# Altium PCB smartmcupcb.PcbDoc
Units mm, origin at the board's own origin, x right, y up, seen from the top; angles counter-clockwise.
Board outline 60.96 x 47.14 mm, 4 copper layers (Top Layer, GND_layer, 3.3V_layer, Bottom Layer), stack 0.603 mm thick; 88 components, 43 nets, 255 pads, 77 vias.
Unrouted connection lines stored in the file: 67.
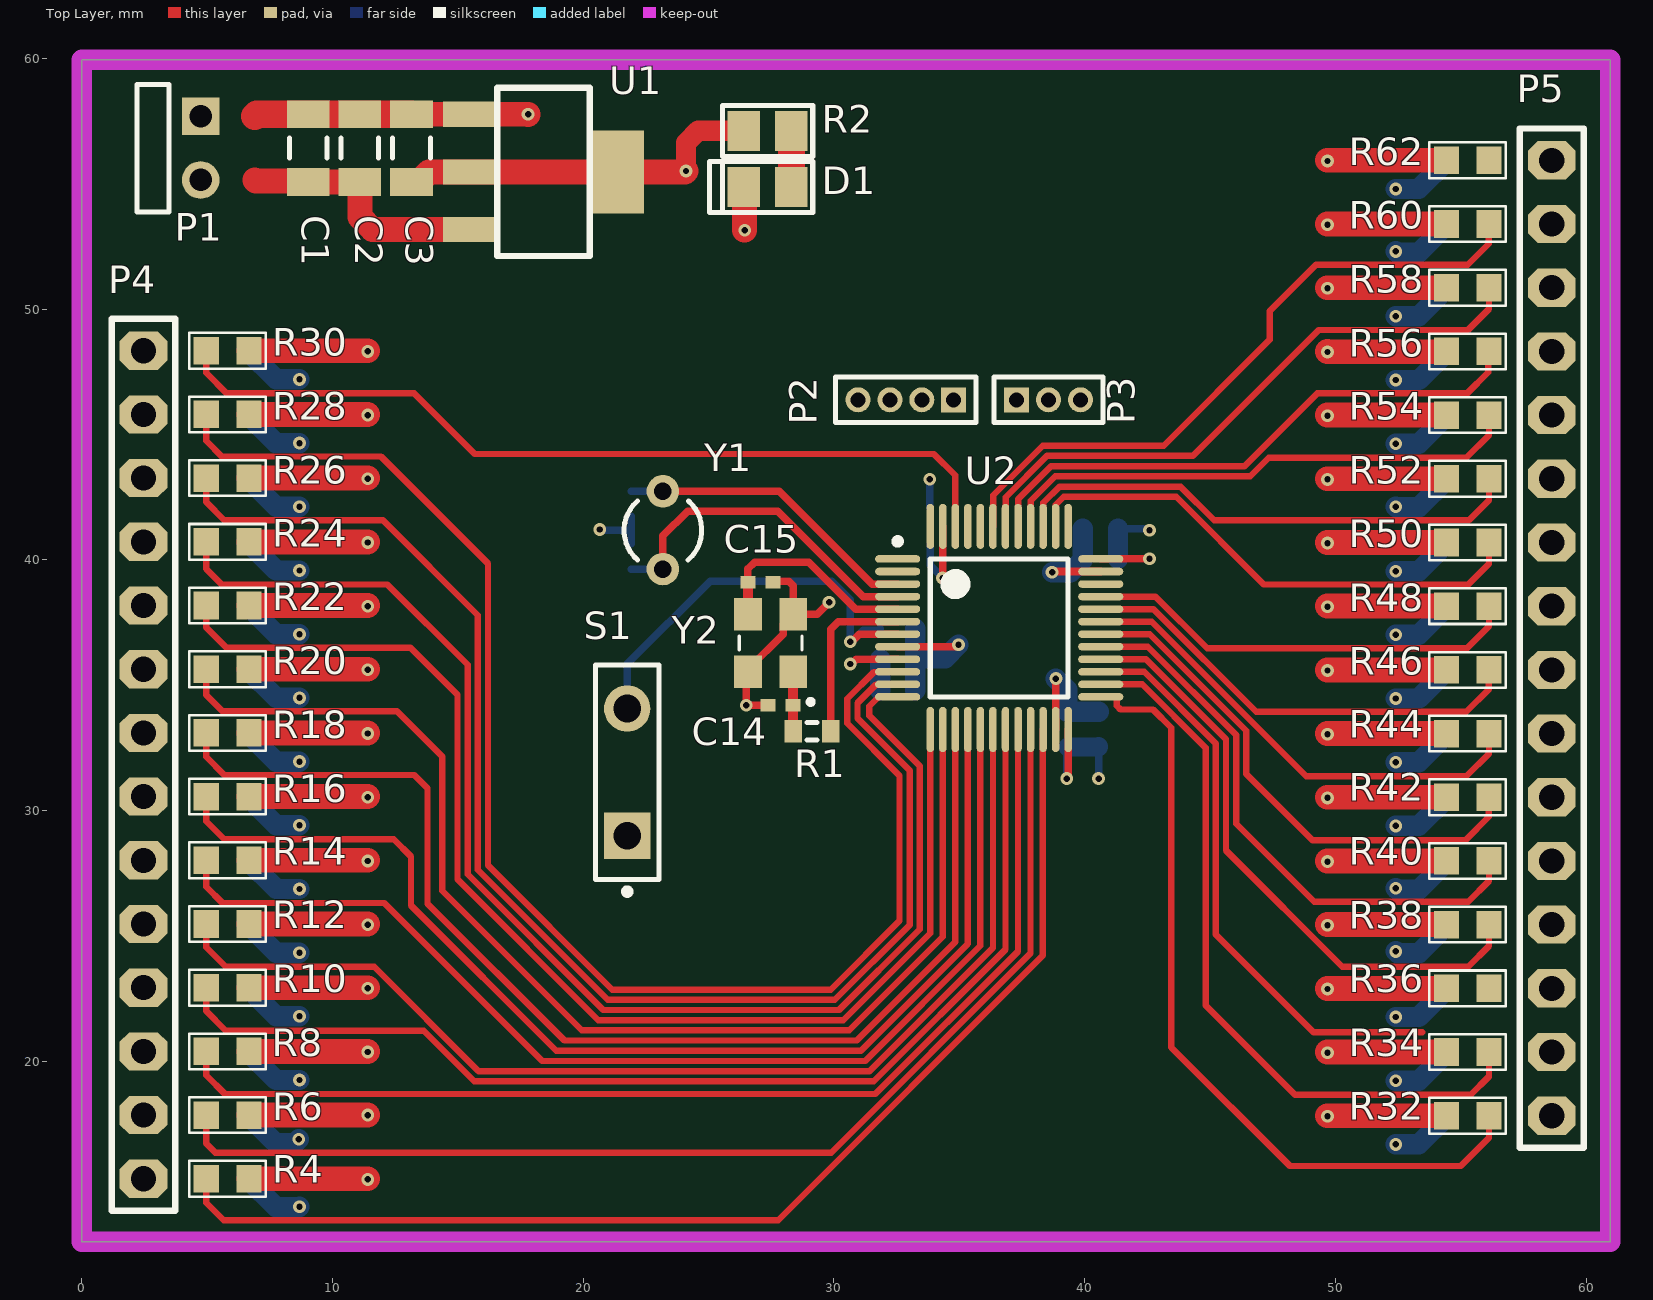
[diagram p0: Top Layer view]
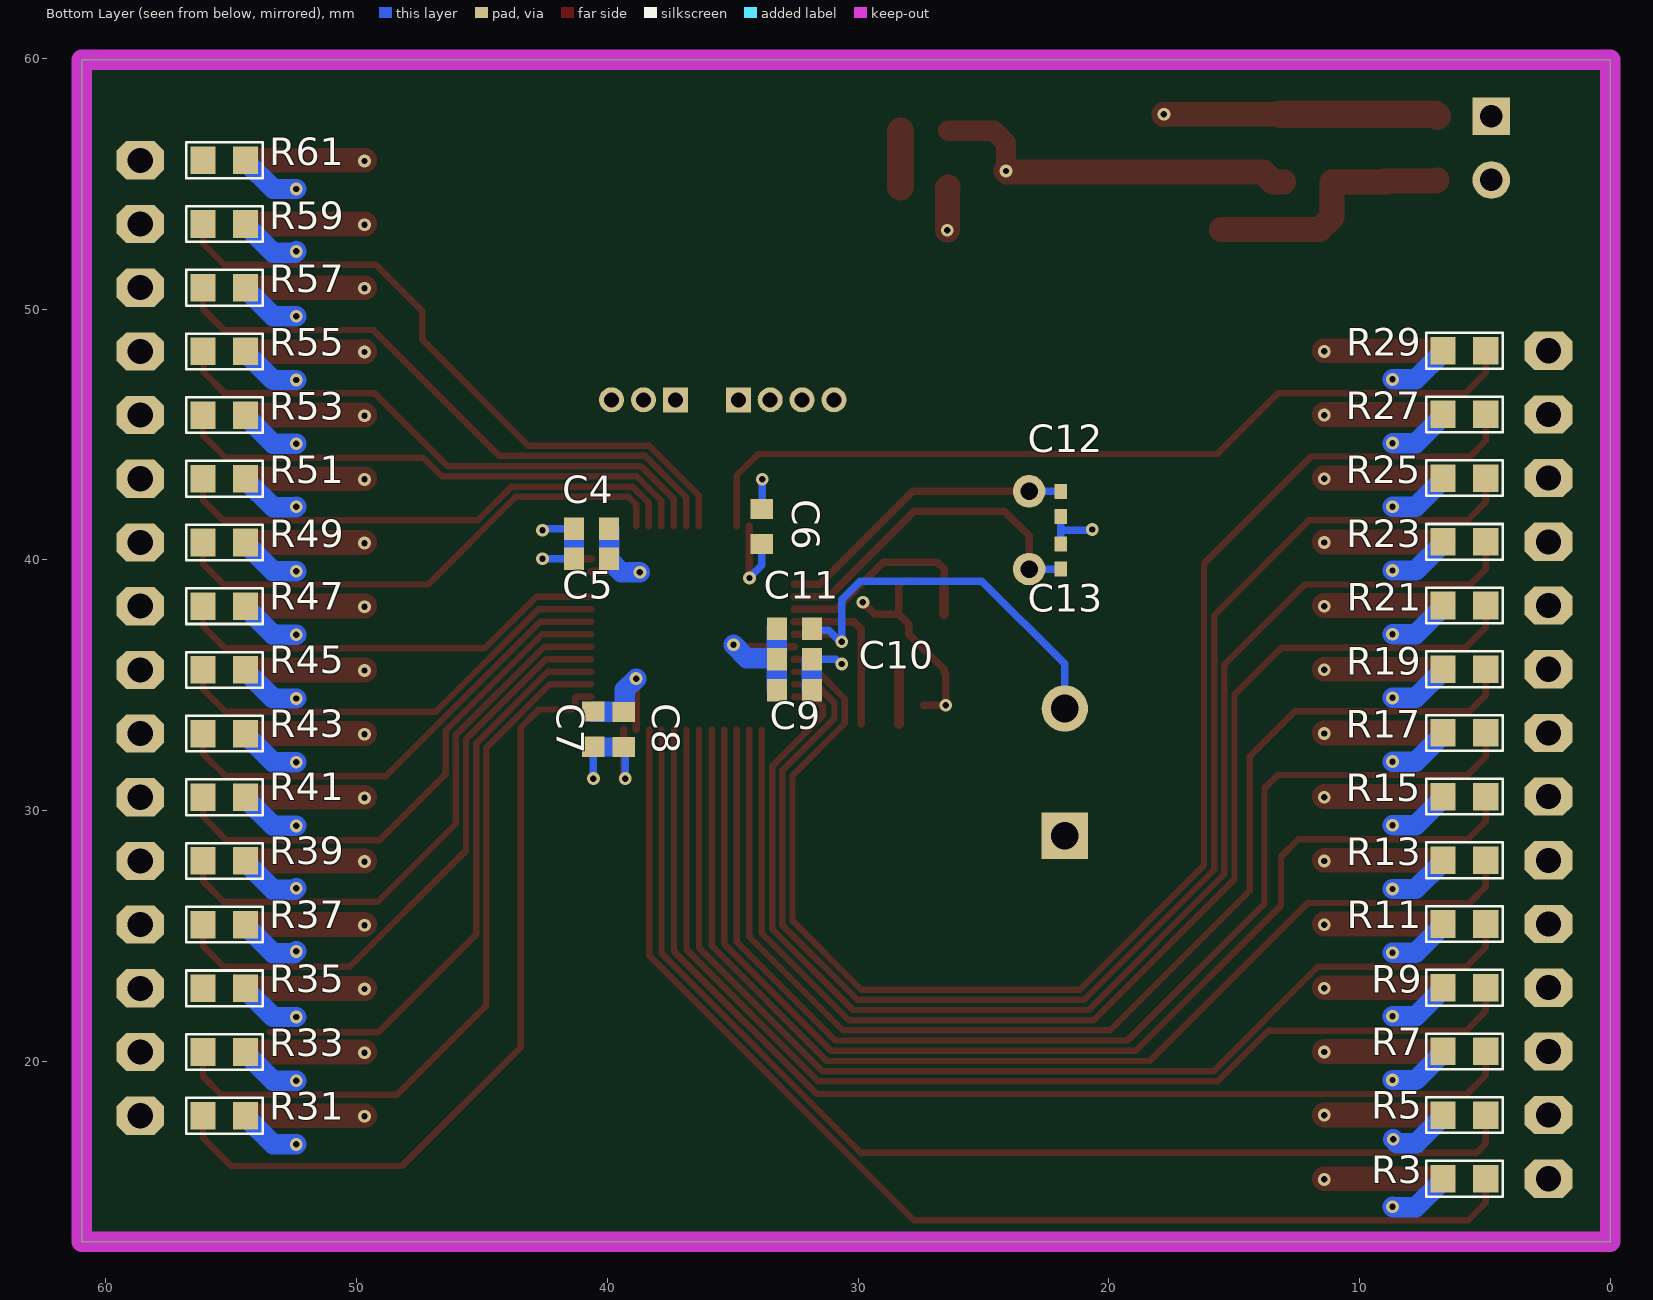
[diagram p1: Bottom Layer view, seen from below]
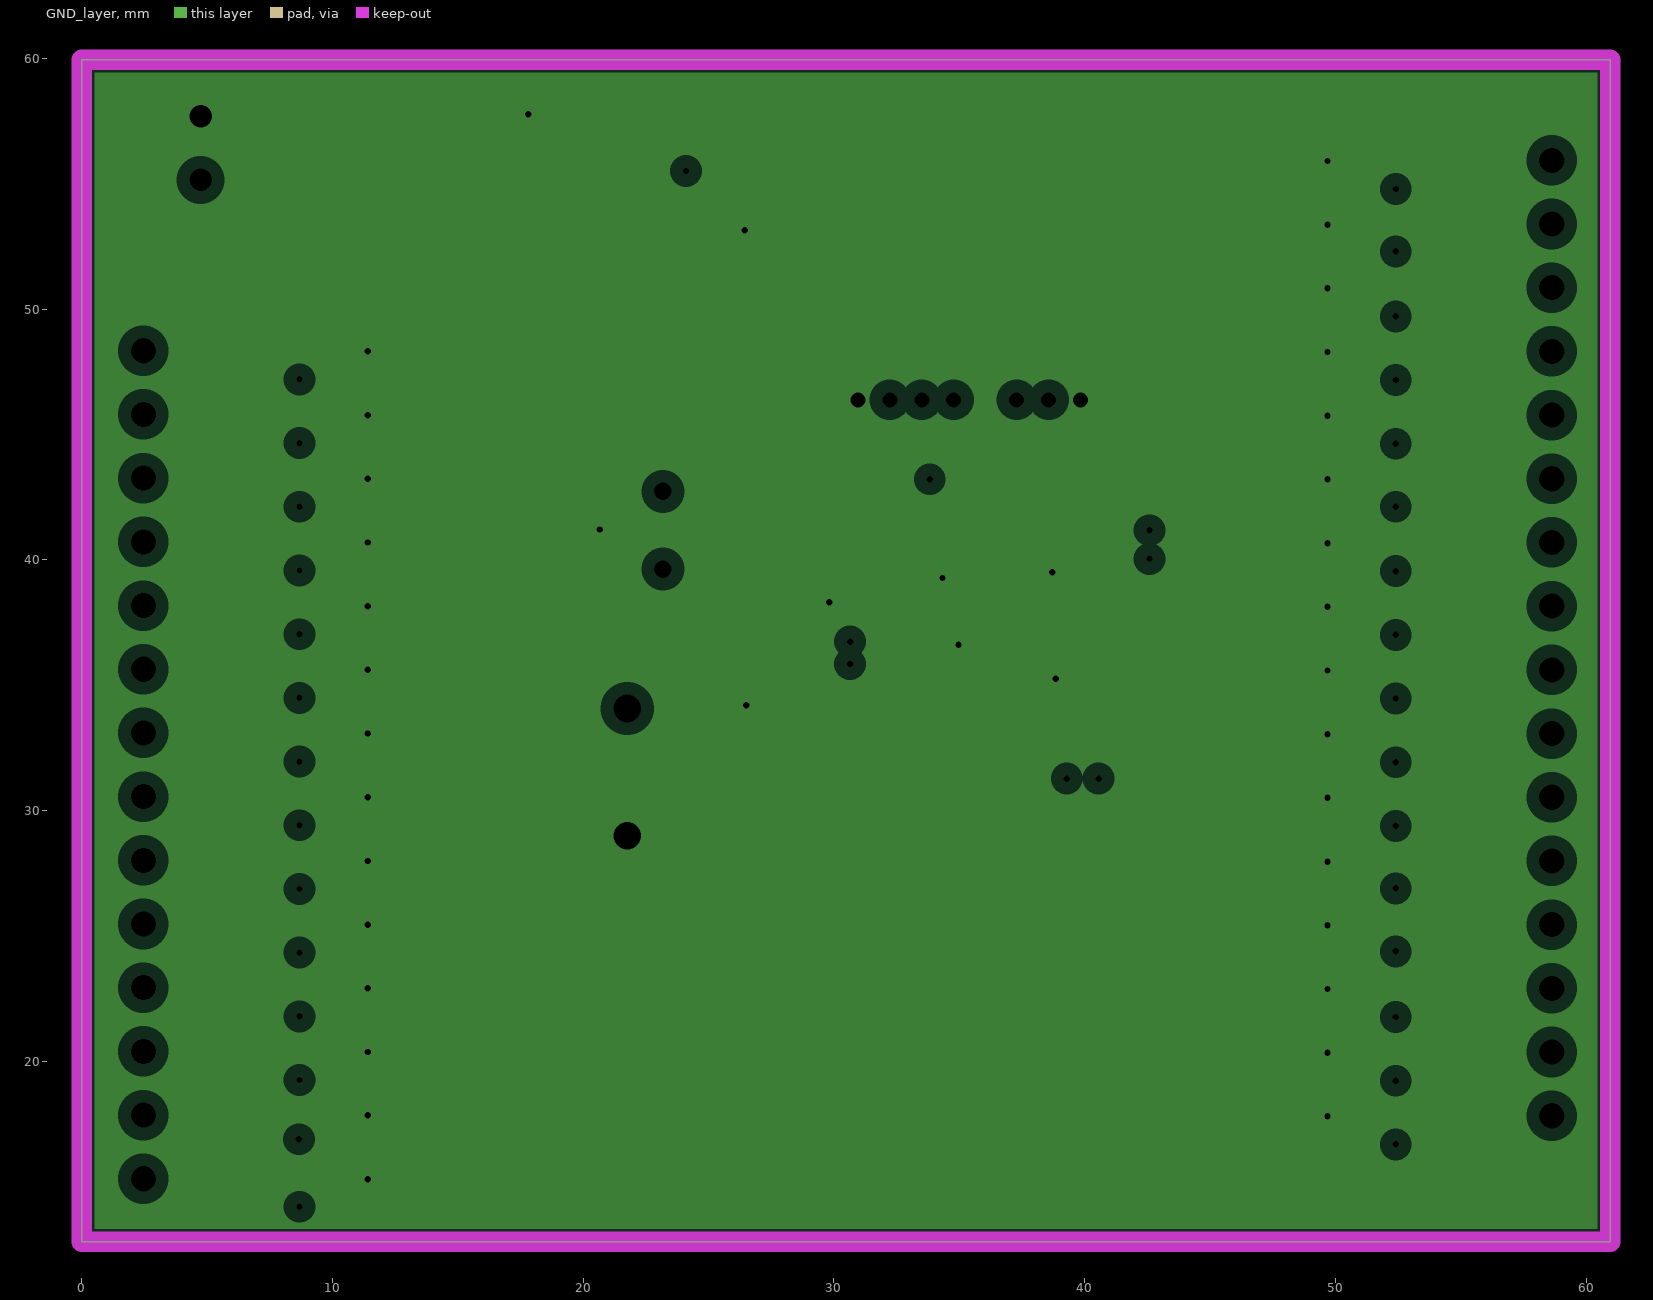
[diagram p2: GND_layer, clearances drawn from the general rule]
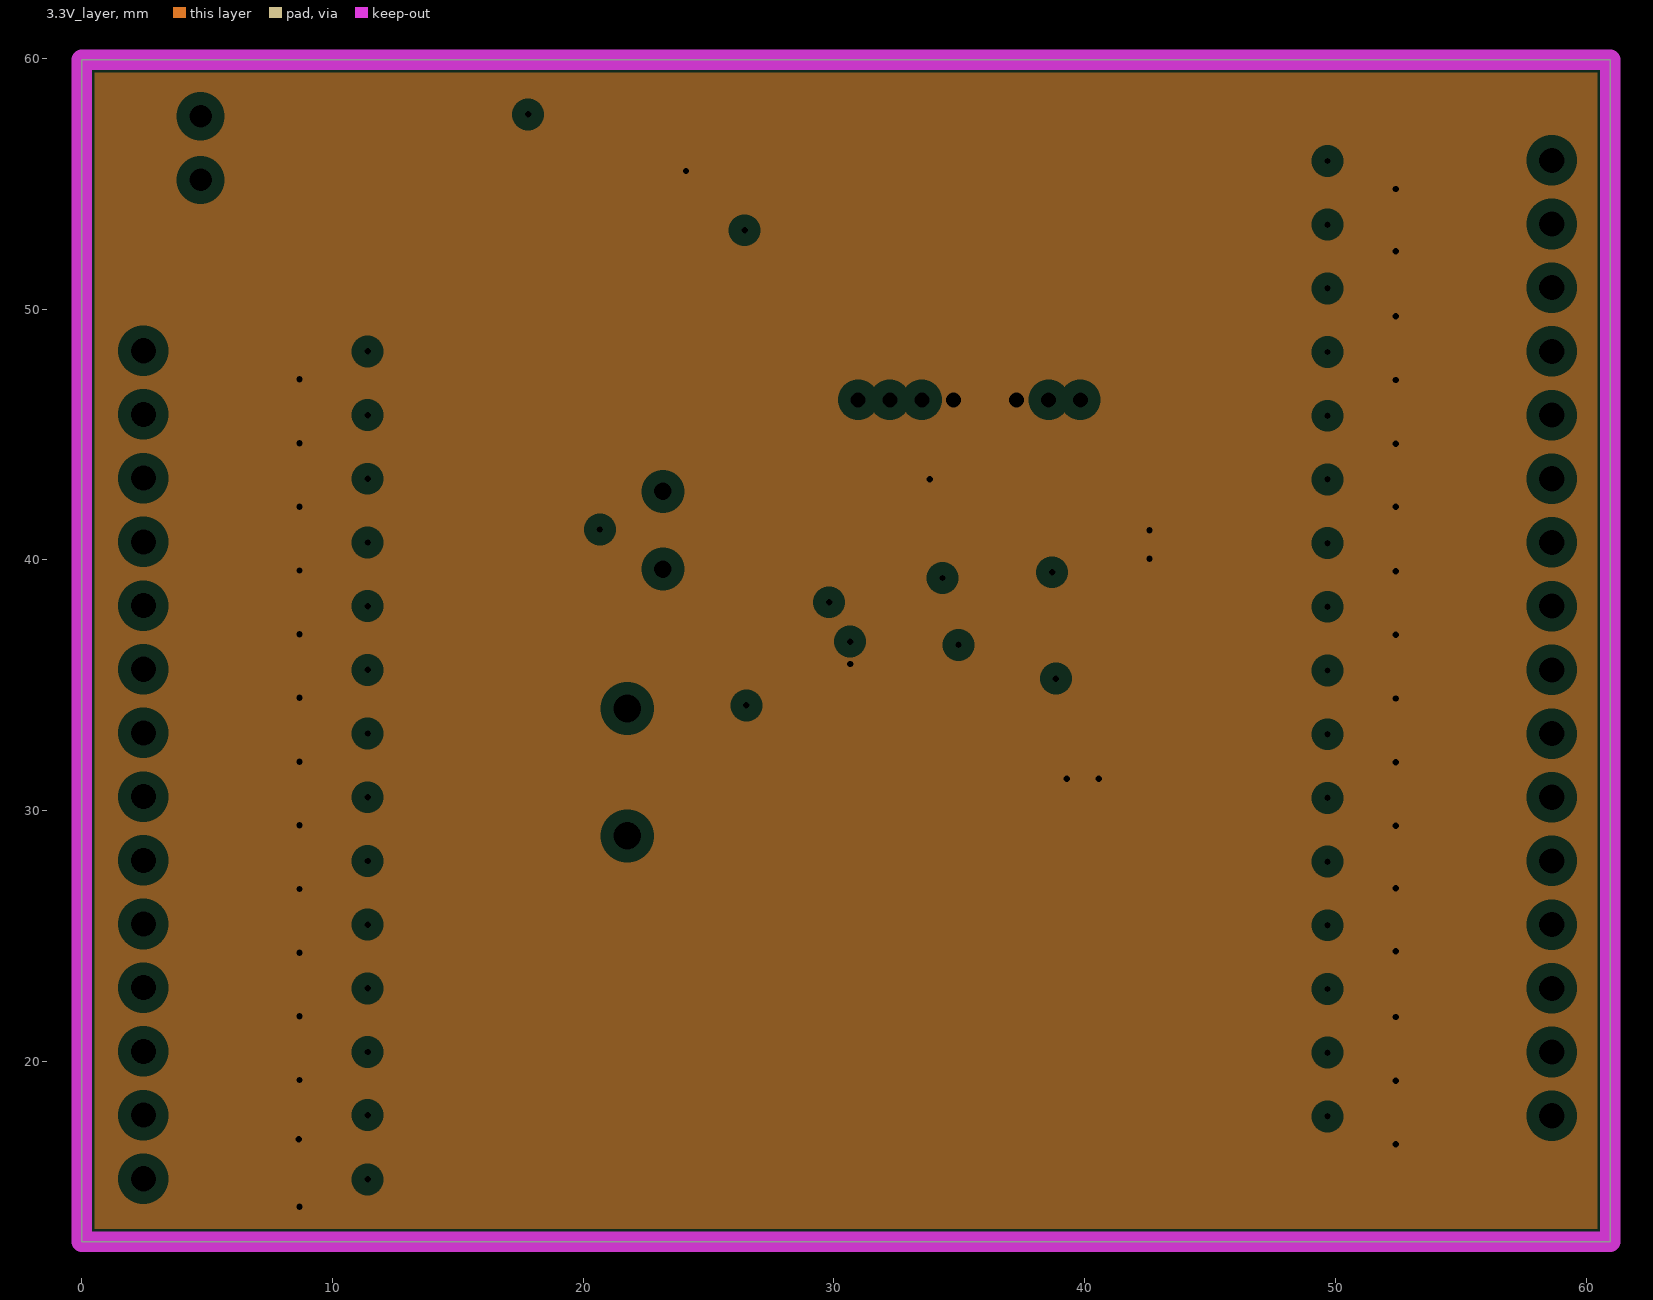
[diagram p3: 3.3V_layer, clearances drawn from the general rule]
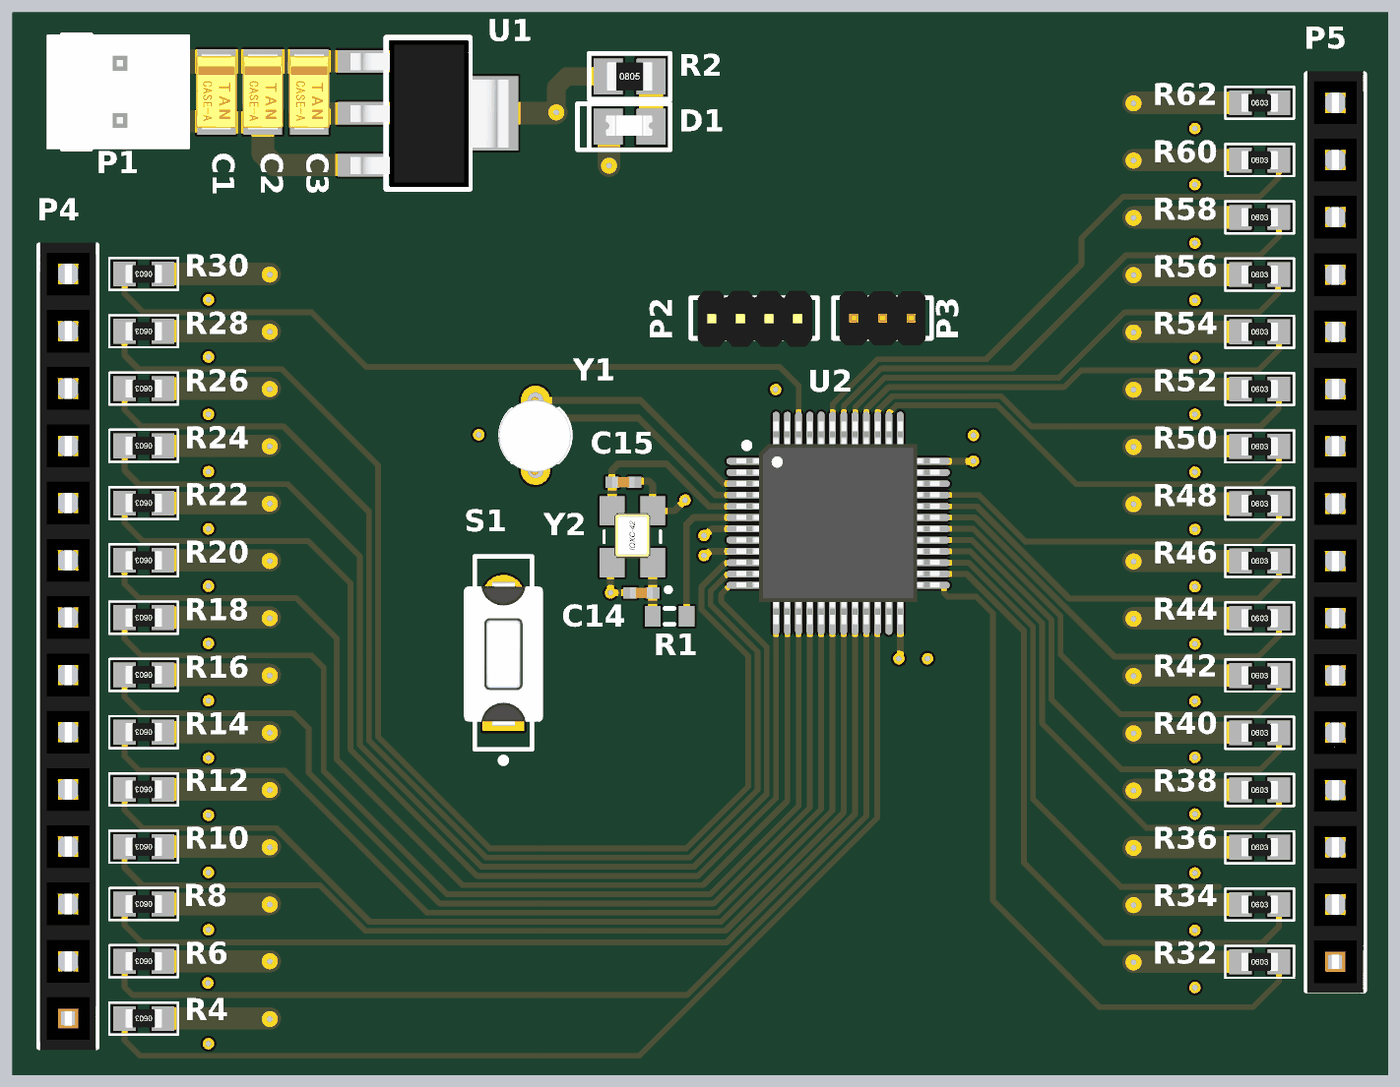
[diagram p4: 3D render of the assembled board from above, using the file's embedded part models]
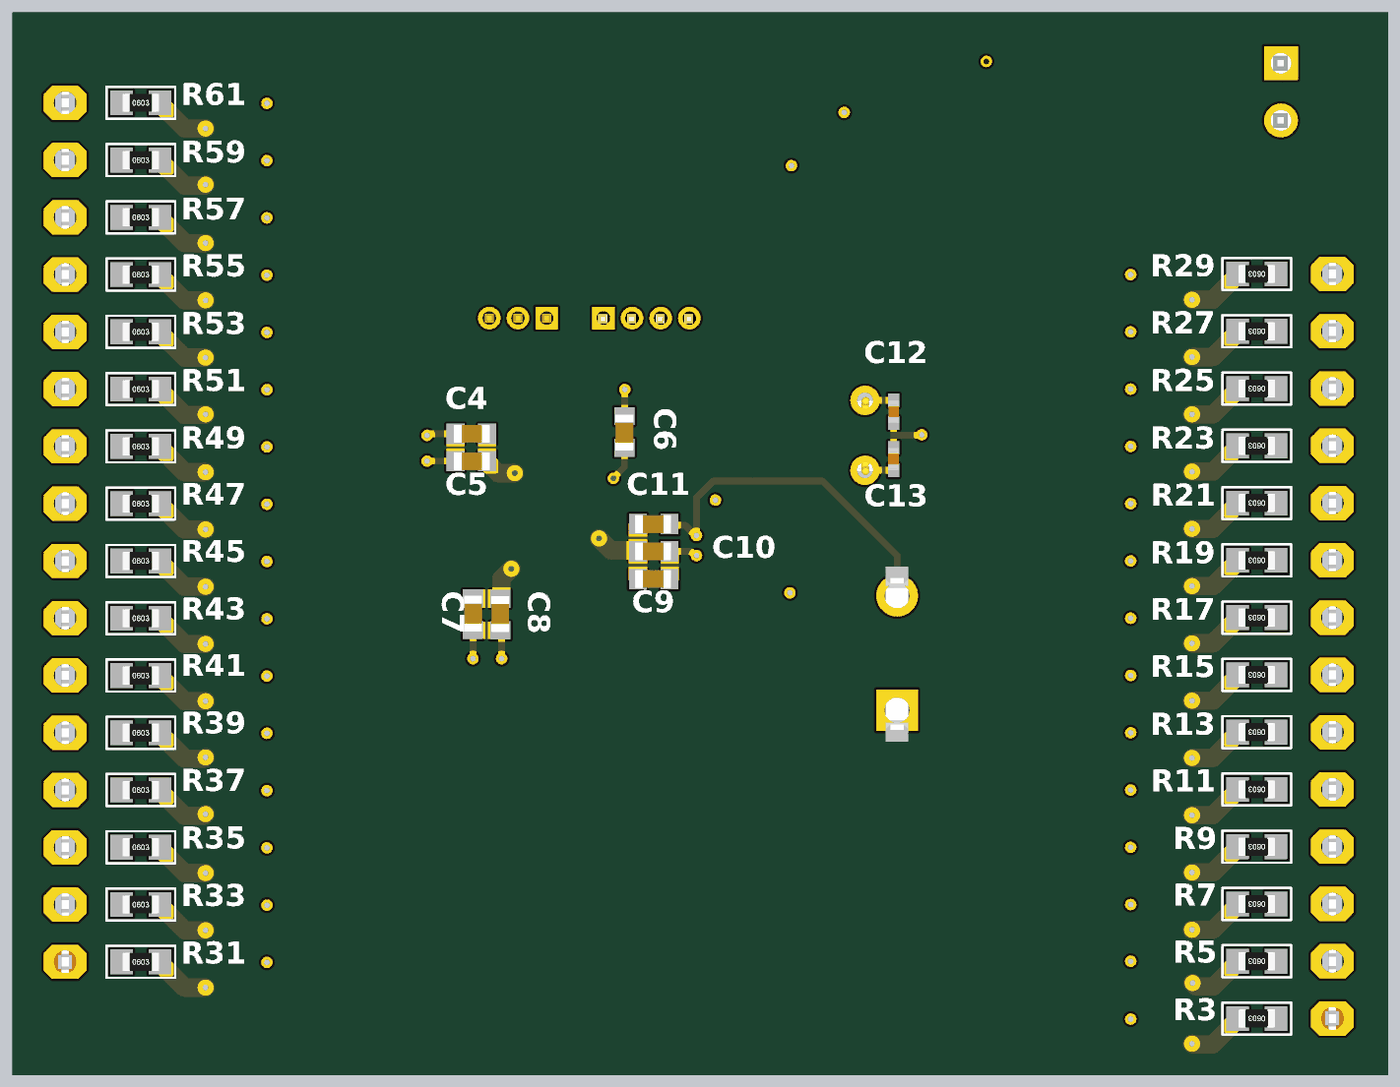
[diagram p5: 3D render of the assembled board from below, using the file's embedded part models]

## Layer stack, top to bottom
Top Solder: solder mask 0.0102, Solder Resist, Dk 3.5
Top Layer: signal copper 0.0356
Dielectric 2: prepreg 0.0711, PP-006, Dk 4.1
GND_layer: plane copper 0.035, net GND
Dielectric 1: dielectric 0.32, FR-4, Dk 4.8
3.3V_layer: plane copper 0.035, net +3.3V
Dielectric 3: prepreg 0.0711, PP-006, Dk 4.1
Bottom Layer: signal copper 0.0356
Bottom Solder: solder mask 0.0102, Solder Resist, Dk 3.5

## Board outline
0,12.802 0,59.944 60.96,59.944 60.96,12.802

## Design rules (kind name [scope] priority, off if disabled: settings)
Clearance [All] p1: gap=0.152 ignorepadtopadclearanceinfootprint=FALSE
PlaneClearance [All] p1: clearance=0.508
PlaneConnect [All] p1: planeconnectstyle=Direct reliefexpansion=0.508 reliefentries=4 reliefconductorwidth=0.254 reliefairgap=0.254
PolygonConnect [All] p1: connectstyle=Direct reliefconductorwidth=0.254 reliefentries=4 polygonreliefangle="90 Angle" airgapwidth=0.254
RoomDefinition MCU [InComponentClass('Room Definition1')] p1: confinementstyle=ConfineIn formatcopy=TRUE lockcomponents=FALSE outline 19.75,26.488 43.499,26.488 43.499,44.09 19.75,44.09
RoomDefinition "DC Power" [InComponentClass('PowerSupply')] p2: confinementstyle=ConfineIn formatcopy=TRUE lockcomponents=FALSE outline 1.245,51.714 29.515,51.714 29.515,59.334 1.245,59.334
RoomDefinition "Right IOs" [InComponentClass('Room Definition3')] p3: confinementstyle=ConfineIn formatcopy=TRUE lockcomponents=FALSE outline 53.442,16.18 60.274,16.18 60.274,57.582 53.442,57.582
RoomDefinition "Left IOs" [InComponentClass('Room Definition2')] p4: confinementstyle=ConfineIn formatcopy=TRUE lockcomponents=FALSE outline 0.813,13.665 7.645,13.665 7.645,49.987 0.813,49.987
RoutingVias [All] p1: holewidth=0.254 width=0.508 viastyle="Through Hole" minholewidth=0.254 minwidth=0.508 maxholewidth=0.711 maxwidth=1.27
SolderMaskExpansion [All] p1: expansion=0.102 istentingtop=FALSE
SupplyNets "Schematic Supply Nets_2" [InNet('GND')] p1: voltage=0.000
SupplyNets "Schematic Supply Nets_1" [InNet('+9V')] p2: voltage=0.000
SupplyNets "Schematic Supply Nets" [InNet('+3.3V')] p3: voltage=0.000
Width [All] p1: maxlimit=1.092 minlimit=0.254 preferedwidth=0.254
28 further rules are at their usual default settings.

## Classes and differential pairs
component class "Room Definition4": C1 C2 C3 D1 P1 P4 R2 U1
component class "Room Definition3": P5 R31 R32 R33 R34 R35 R36 R37 R38 R39 R40 R41 R42 R43 R44 R45 R46 R47 R48 R49 R50 R51 R52 R53 R54 R55 R56 R57 R58 R59 R60 R61 R62
component class "Room Definition2": P4 R3 R4 R5 R6 R7 R8 R9 R10 R11 R12 R13 R14 R15 R16 R17 R18 R19 R20 R21 R22 R23 R24 R25 R26 R27 R28 R29 R30
component class "Room Definition1": C4 C5 C6 C7 C8 C9 C10 C11 C12 C13 C14 C15 R1 S1 U2 Y1 Y2
component class MCU: C4 C5 C6 C7 C8 C9 C10 C11 C12 C13 C14 C15 P2 P3 P4 P5 R1 R3 R4 R5 R6 R7 R8 R9 R10 R11 R12 R13 R14 R15 R16 R17 R18 R19 R20 R21 R22 R23 R24 R25 R26 R27 R28 R29 R30 R31 R32 R33 R34 R35 R36 R37 R38 R39 R40 R41 R42 R43 R44 R45 R46 R47 R48 R49 R50 R51 R52 R53 R54 R55 R56 R57 R58 R59 R60 R61 R62 S1 U2 Y1 Y2
component class PowerSupply: C1 C2 C3 D1 P1 R2 U1

## Components (designator, comment, footprint, x,y, rotation, side; value= is the part's Value field where it differs from the comment)
C1 "tantalum cap" C1206tancap 9.039,56.417 r270 top value=100nF
C2 "Tantalum Cap" C1206tancap 11.096,56.417 r270 top value=10uF
C3 "Tantalum Cap" C1206tancap 13.153,56.417 r270 top value=100uF
C4 "Cap Semi_1" 1608[0603]cap 40.629,41.246 r180 bottom value=100nF
C5 "Cap Semi_1" 1608[0603]cap 40.629,40.033 r180 bottom value=100nF
C6 "Cap Semi_1" 1608[0603]cap 33.84,41.333 r270 bottom value=100nF
C7 "Cap Semi_1" 1608[0603]cap 40.552,33.245 r90 bottom value=100nF
C8 "Cap Semi_1" 1608[0603]cap 39.34,33.233 r90 bottom value=4.7uF
C9 "Cap Semi_1" 1608[0603]cap 32.54,34.805 r0 bottom value=10nF
C10 "Cap Semi_1" 1608[0603]cap 32.54,36.033 r0 bottom value=1uF
C11 "Cap Semi_1" 1608[0603]cap 32.54,37.244 r0 bottom value=100nF
C12 "Cap Semi_4" 0402cap 21.909,42.231 r90 bottom value=10pF
C13 "Cap Semi_4" 0402cap 21.909,40.131 r270 bottom value=10pF
C14 "Cap Semi_4" 0402cap 27.871,34.196 r0 top value=10pF
C15 "Cap Semi_4" 0402cap 27.071,39.098 r180 top value=10pF
D1 "LED" MY_LED_0805 27.352,54.944 r0 top
P1 "Battery Connection 9V" HDR1X2H3dbody 4.746,57.687 r270 top
P2 "MHDR1X4" MHDR1X4body 34.773,46.38 r180 top
P3 "MHDR1X3" MHDR1X3body 37.287,46.38 r0 top
P4 "" MY_FE14 2.464,31.826 r90 top
P5 "" MY_FE16 58.623,36.881 r90 top
R1 "Res3" J1-0603 29.121,33.154 r180 top value=10R
R2 "330R" MY_0805 27.352,57.103 r0 top
R3 "" MY_0603 5.817,15.316 r0 bottom value=1K
R4 "" MY_0603 5.817,15.316 r180 top value=1K
R5 "" MY_0603 5.817,17.856 r0 bottom value=1K
R6 "" MY_0603 5.817,17.856 r180 top value=1K
R7 "" MY_0603 5.817,20.396 r0 bottom value=1K
R8 "" MY_0603 5.817,20.396 r180 top value=1K
R9 "" MY_0603 5.817,22.936 r0 bottom value=1K
R10 "" MY_0603 5.817,22.936 r180 top value=1K
R11 "" MY_0603 5.817,25.476 r0 bottom value=1K
R12 "" MY_0603 5.817,25.476 r180 top value=1K
R13 "" MY_0603 5.817,28.016 r0 bottom value=1K
R14 "" MY_0603 5.817,28.016 r180 top value=1K
R15 "" MY_0603 5.817,30.556 r0 bottom value=1K
R16 "" MY_0603 5.817,30.556 r180 top value=1K
R17 "" MY_0603 5.817,33.096 r0 bottom value=1K
R18 "" MY_0603 5.817,33.096 r180 top value=1K
R19 "" MY_0603 5.817,35.636 r0 bottom value=1K
R20 "" MY_0603 5.817,35.636 r180 top value=1K
R21 "" MY_0603 5.817,38.176 r0 bottom value=1K
R22 "" MY_0603 5.817,38.176 r180 top value=1K
R23 "" MY_0603 5.817,40.716 r0 bottom value=1K
R24 "" MY_0603 5.817,40.716 r180 top value=1K
R25 "" MY_0603 5.817,43.256 r0 bottom value=1K
R26 "" MY_0603 5.817,43.256 r180 top value=1K
R27 "" MY_0603 5.817,45.796 r0 bottom value=1K
R28 "" MY_0603 5.817,45.796 r180 top value=1K
R29 "" MY_0603 5.817,48.336 r0 bottom value=1K
R30 "" MY_0603 5.817,48.336 r180 top value=1K
R31 "" MY_0603 55.27,17.831 r180 bottom value=1K
R32 "" MY_0603 55.27,17.831 r0 top value=1K
R33 "" MY_0603 55.27,20.371 r180 bottom value=1K
R34 "" MY_0603 55.27,20.371 r0 top value=1K
R35 "" MY_0603 55.27,22.911 r180 bottom value=1K
R36 "" MY_0603 55.27,22.911 r0 top value=1K
R37 "" MY_0603 55.27,25.451 r180 bottom value=1K
R38 "" MY_0603 55.27,25.451 r0 top value=1K
R39 "" MY_0603 55.27,27.991 r180 bottom value=1K
R40 "" MY_0603 55.27,27.991 r0 top value=1K
R41 "" MY_0603 55.27,30.531 r180 bottom value=1K
R42 "" MY_0603 55.27,30.531 r0 top value=1K
R43 "" MY_0603 55.27,33.071 r180 bottom value=1K
R44 "" MY_0603 55.27,33.071 r0 top value=1K
R45 "" MY_0603 55.27,35.611 r180 bottom value=1K
R46 "" MY_0603 55.27,35.611 r0 top value=1K
R47 "" MY_0603 55.27,38.151 r180 bottom value=1K
R48 "" MY_0603 55.27,38.151 r0 top value=1K
R49 "" MY_0603 55.27,40.691 r180 bottom value=1K
R50 "" MY_0603 55.27,40.691 r0 top value=1K
R51 "" MY_0603 55.27,43.231 r180 bottom value=1K
R52 "" MY_0603 55.27,43.231 r0 top value=1K
R53 "" MY_0603 55.27,45.771 r180 bottom value=1K
R54 "" MY_0603 55.27,45.771 r0 top value=1K
R55 "" MY_0603 55.27,48.311 r180 bottom value=1K
R56 "" MY_0603 55.27,48.311 r0 top value=1K
R57 "" MY_0603 55.27,50.851 r180 bottom value=1K
R58 "" MY_0603 55.27,50.851 r0 top value=1K
R59 "" MY_0603 55.27,53.391 r180 bottom value=1K
R60 "" MY_0603 55.27,53.391 r0 top value=1K
R61 "" MY_0603 55.27,55.931 r180 bottom value=1K
R62 "" MY_0603 55.27,55.931 r0 top value=1K
S1 "SW-PB" SPST-2_body 21.756,31.529 r90 top
U1 "" "4-Pin SOT" 18.416,52.117 r270 top
U2 "" STM-LQFP48_N 36.59,37.283 r0 top
Y1 "XTAL" 32768 23.179,41.181 r0 top
Y2 "ECS-80-12-33-JGN-TR" 8MHZCrystall 27.471,36.685 r90 top

## Footprints (in the part's own frame and the unit in brackets; to place one, negate y for a bottom-side part, rotate by r counter-clockwise, add the part's x,y. Pads: shape width x height; smd on the part's side, far side on the other; paste and mask are expansions set on the pad)
"4-Pin SOT" [mm]
  rect 1x2.2 smd: 0(-1.05,-2.9) 1(-5.65,-2.9) 2(-3.35,-2.9)
  rect 3.3x2.2 smd: 2(-3.35,2.9)
  silkscreen extent -6.7,-1.85 0,1.85, body extent -6.58,-3.44 -0.08,3.56, height 1.68
8MHZCrystall [mm]
  rect 1.3x1.1 smd: 1(-1.15,-0.9) 2(1.15,-0.9) 3(1.15,0.9) 4(-1.15,0.9)
  silkscreen extent -2.45,-1.7 0.27,1.25, body extent -0.95,-0.8 1.05,0.8, height 0.49
0402cap [mm] "Chip Capacitor, Body 1.0x0.5mm, IPC High Density"
  rect 0.6x0.5 smd: 1(-0.5,0) 2(0.5,0)
  body extent -0.5,-0.25 0.5,0.25, height 0.51
1608[0603]cap [mm] "Chip Capacitor, Body 1.6x0.8mm, IPC High Density"
  rect 0.8x0.9 smd: 1(-0.7,0) 2(0.7,0)
  body extent -0.77,-0.4 0.83,0.4, height 0.9
32768 [mm] "Crystal, Thru-Hole; 2 Leads; Body 3.1 x 8.2 mm (Dia.xH)"
  round 1.3 hole 0.7: 1(0,1.55) 2(0,-1.55)
  silkscreen extent -1.55,-1.19 1.55,1.17, body extent -1.63,-1.75 1.57,1.7, height 9.54
C1206tancap [mm]
  rect 1.1x1.7 smd: 1(-1.35,0) 2(1.35,0)
  silkscreen extent -0.4,-0.75 0.4,0.75, body extent -1.7,-0.9 1.7,0.9, height 1.8
HDR1X2H3dbody [mm] "Connector; Header; 2 Position; Right Angle"
  rect 1.5x1.5 hole 0.9: 1(0,0)
  round 1.5 hole 0.9: 2(2.54,0)
  silkscreen extent -1.27,-2.54 3.81,-1.27, body extent -1.27,-3.23 3.81,3.12, height 11.19
J1-0603 [mm] "Chip Resistor, Body 1.6x0.8mm, IPC High Density"
  rect 0.7x0.9 smd: 1(-0.75,0) 2(0.75,0)
  silkscreen extent -0.2,-0.35 0.2,0.35, body extent -0.85,-0.48 0.85,0.48, height 0.9
MHDR1X3body [mm] "Connector; Header; 3 Position"
  rect 1x1 hole 0.6: 1(0,0)
  round 1 hole 0.6: 2(1.27,0) 3(2.54,0)
  silkscreen extent -0.9,-0.9 3.44,0.9, body extent -0.64,-1.2 3.17,1.2, height 5
MHDR1X4body [mm] "Connector; Header; 4 Position"
  rect 1x1 hole 0.6: 1(0,0)
  round 1 hole 0.6: 2(1.27,0) 3(2.54,0) 4(3.81,0)
  silkscreen extent -0.9,-0.9 4.71,0.9, body extent -0.66,-1.22 4.42,1.28, height 4.61
MY_0603 [mm]
  rect 1x1.1 smd: 1(-0.85,0) 2(0.85,0)
  silkscreen extent -1.52,-0.71 1.52,0.71, body extent -0.8,-0.4 0.8,0.4, height 0.44
MY_0805 [mm]
  rect 1.3x1.6 smd: 1(-0.95,0) 2(0.95,0)
  silkscreen extent -1.8,-1.02 1.8,1.02, body extent -1,-0.62 1,0.63, height 0.59
MY_FE14 [mm]
  oct 1.524x1.905 hole 1: 1(-16.51,0) 2(-13.97,0) 3(-11.43,0) 4(-8.89,0) 5(-6.35,0) 6(-3.81,0) 7(-1.27,0) 8(1.27,0) 9(3.81,0) 10(6.35,0) 11(8.89,0) 12(11.43,0) 13(13.97,0) 14(16.51,0)
  silkscreen extent -17.78,-1.27 17.78,1.27, body extent -17.9,-1.25 17.91,1.25, height 8.5
MY_FE16 [mm]
  oct 1.524x1.905 hole 1: 1(-19.05,0) 2(-16.51,0) 3(-13.97,0) 4(-11.43,0) 5(-8.89,0) 6(-6.35,0) 7(-3.81,0) 8(-1.27,0) 9(1.27,0) 10(3.81,0) 11(6.35,0) 12(8.89,0) 13(11.43,0) 14(13.97,0) 15(16.51,0) 16(19.05,0)
  silkscreen extent -20.32,-1.27 20.32,1.27, body extent -20.44,-1.25 20.45,1.25, height 8.5
MY_LED_0805 [mm]
  rect 1.3x1.6 smd: A(0.95,-0.076) K(-0.95,-0.076)
  silkscreen extent -2.31,-1.09 1.8,0.94, body extent -1.06,-0.48 1.01,0.42, height 0.86
SPST-2_body [mm] "Switch; 2 Leads"
  rect 1.85x1.85 hole 1.1: 1(-2.54,0)
  round 1.85 hole 1.1: 2(2.54,0)
  silkscreen extent -4.89,-1.27 4.28,1.27, body extent -3.93,-1.75 3.83,1.75, height 5.25
STM-LQFP48_N [mm]
  oval 1.8x0.3 smd: 1(-4.05,2.75) 2(-4.05,2.25) 3(-4.05,1.75) 4(-4.05,1.25) 5(-4.05,0.75) 6(-4.05,0.25) 7(-4.05,-0.25) 8(-4.05,-0.75) 9(-4.05,-1.25) 10(-4.05,-1.75) 11(-4.05,-2.25) 12(-4.05,-2.75) 25(4.05,-2.75) 26(4.05,-2.25) 27(4.05,-1.75) 28(4.05,-1.25) 29(4.05,-0.75) 30(4.05,-0.25) 31(4.05,0.25) 32(4.05,0.75) 33(4.05,1.25) 34(4.05,1.75) 35(4.05,2.25) 36(4.05,2.75)
  oval 0.3x1.8 smd: 13(-2.75,-4.05) 14(-2.25,-4.05) 15(-1.75,-4.05) 16(-1.25,-4.05) 17(-0.75,-4.05) 18(-0.25,-4.05) 19(0.25,-4.05) 20(0.75,-4.05) 21(1.25,-4.05) 22(1.75,-4.05) 23(2.25,-4.05) 24(2.75,-4.05) 37(2.75,4.05) 38(2.25,4.05) 39(1.75,4.05) 40(1.25,4.05) 41(0.75,4.05) 42(0.25,4.05) 43(-0.25,4.05) 44(-0.75,4.05) 45(-1.25,4.05) 46(-1.75,4.05) 47(-2.25,4.05) 48(-2.75,4.05)
  silkscreen extent -4.17,-2.75 2.75,3.57, body extent -4.5,-4.49 4.5,4.51, height 1.56

## Part data
C1 C2: library part "Cap Semi_5", "Capacitor (Semiconductor SIM Model)", LatestRevisionDate=29-May-2009, LatestRevisionNote="IPC-7351 Footprint Added.", PackageDescription="Chip Capacitor", PackageReference=C1206, Published=8-Jun-2000, Publisher="Altium Limited"
C3: library part "Cap Semi_6", "Capacitor (Semiconductor SIM Model)", LatestRevisionDate=29-May-2009, LatestRevisionNote="IPC-7351 Footprint Added.", PackageDescription="Chip Capacitor", PackageReference=C1206, Published=8-Jun-2000, Publisher="Altium Limited"
C4 C5 C6 C7 C11 C12 C13 C14 C15: "Capacitor (Semiconductor SIM Model)", LatestRevisionDate=29-May-2009, LatestRevisionNote="IPC-7351 Footprint Added.", PackageDescription="Chip Capacitor", PackageReference=C1206, Published=8-Jun-2000, Publisher="Altium Limited"
C8: library part "Cap Semi_1_1", "Capacitor (Semiconductor SIM Model)", LatestRevisionDate=29-May-2009, LatestRevisionNote="IPC-7351 Footprint Added.", PackageDescription="Chip Capacitor", PackageReference=C1206, Published=8-Jun-2000, Publisher="Altium Limited"
C9: library part "Cap Semi_1_2", "Capacitor (Semiconductor SIM Model)", LatestRevisionDate=29-May-2009, LatestRevisionNote="IPC-7351 Footprint Added.", PackageDescription="Chip Capacitor", PackageReference=C1206, Published=8-Jun-2000, Publisher="Altium Limited"
C10: library part "Cap Semi_1_3", "Capacitor (Semiconductor SIM Model)", LatestRevisionDate=29-May-2009, LatestRevisionNote="IPC-7351 Footprint Added.", PackageDescription="Chip Capacitor", PackageReference=C1206, Published=8-Jun-2000, Publisher="Altium Limited"
D1: "Typical INFRARED GaAs LED", ASiD Part Number=LED-AS
P1: library part "Header 2H", "Header, 2-Pin, Right Angle", Voltage=9V, LatestRevisionDate=17-Jul-2002, LatestRevisionNote="Re-released for DXP Platform.", Publisher="Altium Limited"
P2: "Header, 4-Pin", LatestRevisionDate=17-Jul-2002, LatestRevisionNote="Re-released for DXP Platform.", Publisher="Altium Limited"
P3: "Header, 3-Pin", LatestRevisionDate=17-Jul-2002, LatestRevisionNote="Re-released for DXP Platform.", Publisher="Altium Limited"
P4: library part "Header 14", "Header, 14-Pin", ASiD Part Number="Header 14-AS"
P5: library part "Header 16", "Header, 16-Pin", ASiD Part Number="Header 16-AS"
R1: "Resistor", LatestRevisionDate=29-May-2009, LatestRevisionNote="IPC-7351 Footprint Added.", PackageDescription="Chip Resistor", PackageReference=J1-0603, Published=8-Jun-2000, Publisher="Altium Limited"
R2 R3 R4 R5 R6 R7 R8 R9 R10 R11 R12 R13 R14 R15 R16 R17 R18 R19 R20 R21 R22 R23 R24 R25 R26 R27 R28 R29 R30 R31 R32 R33 R34 R35 R36 R37 R38 R39 R40 R41 R42 R43 R44 R45 R46 R47 R48 R49 R50 R51 R52 R53 R54 R55 R56 R57 R58 R59 R60 R61 R62: library part Res, "Standard resistor", ASiD Part Number=Res-AS
S1: "Switch", LatestRevisionDate=17-Jul-2002, LatestRevisionNote="Re-released for DXP Platform.", PackageDescription="Switch; 2 Leads", PackageReference=SPST-2, Published=24-Mar-1999, Publisher="Altium Limited"
U1: library part LM1117, "The LM1117 is a low dropout voltage regulator with a / dropout of 1.2 V at 800 mA of load current. / The LM1117 is available in an adjustable version, / which can set the output voltage from 1.25 V to 13.8 V / with only two external resistors. In addition, the device / is available in five fixed voltages, 1.8 V, 2.5 V, 3.3 V, / and 5 V. / The LM1117 offers current limiting and thermal / shutdown. The circuit includes a Zener trimmed bandgap reference to assure output voltage accuracy to / within ±1%. / A minimum of 10-µF tantalum capacitor is required / at the output to improve the transient response and / stability", Output Voltage=3.3V, ComponentLink1Description=Datasheet, ComponentLink1URL=https://www.ti.com/lit/ds/symlink/lm1117.pdf
U2: library part STM32F103C8T6, "ARM Cortex-M3 32-bit MCU, 64 KB Flash, 20 KB Internal RAM, 37 I/Os, 48-pin LQFP, -40 to 85 degC, Tray", I/Os (High Current)=37, Operating Frequency(F) (Processor speed) (MHz)=72, Supplier Part Number 1=497-6063-ND, Supply Voltage(Vcc) min (V)=2, A/D Converter="2x12-bit (10 Channel)", ComponentLink1Description="Manufacturer URL", ComponentLink1URL=http://www.st.com/web/en/home.html, ComponentLink2Description=Datasheet, ComponentLink2URL=http://www.st.com/st-web-ui/static/active/en/resource/technical/document/datasheet/CD00161566.pdf, ComponentLink3Description="Package Specification", ComponentLink3URL=http://www.st.com/st-web-ui/static/active/en/resource/technical/document/datasheet/DM00058181.pdf, Core="ARM Cortex-M3", DatasheetVersion="Rev. 16", FLASH Size (Prog) (kB)=64, Internal RAM Size (kB)=20, Mounting Technology="Surface Mount", PackageDescription="48-Pin Low Profile Quad Flat Package, 7 x 7 mm Body, 0.5 mm Pitch", PackageReference=LQFP48, PackageVersion="Rev. 6, 06/2013", Packing=Tray, PartNumber=STM32F103C8T6, Supplier 1=Digi-Key, Supplier 2=Farnell, Supplier 3=Newark, Supplier 4=Newark, Supplier 5=Mouser, Supplier Part Number 2=1447637, Supplier Part Number 3=59M2182, Supplier Part Number 4=57P1222, Supplier Part Number 5=511-STM32F103C8T6
Y1: "Crystal Oscillator", LatestRevisionDate=17-Jul-2002, LatestRevisionNote="Re-released for DXP Platform.", PackageDescription="Crystal, Thru-Hole; 2 Leads; Body 3.1 x 8.2 mm (Dia.xH)", PackageReference=R38, Published=8-Jun-2000, Publisher="Altium Limited"
Y2: "8MHz Â±20ppm Crystal 12pF 400 Ohms 4-SMD, No Lead", Package="SMD-4 ECS International", Availability=Warning, BuyPart=https://www.snapeda.com/parts/ECS-80-12-33-JGN-TR/ECS%20Inc./view-part/4477300/?ref=eda, MF="ECS Inc.", Mouser-Purchase-URL=https://snapeda.com/shop?store=Mouser&id=4477300, MP=ECS-80-12-33-JGN-TR, Price=None, SnapEDA_Link=https://www.snapeda.com/parts/ECS-80-12-33-JGN-TR/ECS%20Inc./view-part/4477300/?ref=snap

## Via types
v1: diameter 0.508, hole 0.254, Top Layer to Bottom Layer, 77 vias

## Nets (pads, with @x,y where several pads share a name; then routed paths per layer and width w, separated by ;. In a path a pad name is that pad's centre, name@x,y a point inside that pad or via, vN(x,y) a via of type N, cw(c..) or ccw(c..) an arc to the next point about the centre after c; other vN are vias at no path point)
"32KHz 01": C12.2 U2.3 Y1.1 | length 12.2
  Top Layer w0.3: Y1.1 27.826,42.731 31.524,39.033 U2.3
  Bottom Layer w0.3: C12.2 Y1.1
"32KHz 02": C13.2 U2.4 Y1.2 | length 13.8
  Top Layer w0.3: Y1.2 23.179,40.952 24.169,41.943 27.751,41.943 31.16,38.533 U2.4
  Bottom Layer w0.3: C13.2 Y1.2
+3.3V: C3.2 C4.1 C5.1 C6.1 C7.1 C8.1 C9.1 C10.1 P2.1 P3.1 R2.1 R3.2 R5.2 R7.2 R9.2 R11.2 R13.2 R15.2 R17.2 R19.2 R21.2 R23.2 R25.2 R27.2 R29.2 R31.2 R33.2 R35.2 R37.2 R39.2 R41.2 R43.2 R45.2 R47.2 R49.2 R51.2 R53.2 R55.2 R57.2 R59.2 R61.2 U1.2 U2.9 U2.24 U2.36 U2.48 | length 106.2
  Top Layer w0.3: v1(30.646,35.847) 30.703,35.847 30.889,36.033 U2.9 ; v1(39.282,31.275) 39.282,31.331 39.34,31.389 U2.24 ; U2.36 v1@42.584,40.033
  Top Layer w0.813: v1(24.101,55.503) 24.101,56.627 24.577,57.103 R2.1
  Top Layer w0.991: C3.2@13.026,55.067 C3.2@13.326,55.067 ; C3.2@13.453,55.067 13.849,55.462 15.511,55.462 15.516,55.467 U1.2@21.189,55.467 ; U1.2@21.316,55.467 24.065,55.467 v1(24.101,55.503)
  Bottom Layer w0.3: v1(30.646,35.847) 30.703,35.847 30.889,36.033 C10.1 ; C9.1@31.815,34.831 C9.1 ; v1(33.821,43.213) 33.821,42.052 C6.1 ; v1(39.282,31.275) 39.282,32.476 C8.1 ; v1(40.552,31.275) C7.1 ; C4.1 42.463,41.246 42.528,41.181 v1(42.584,41.181) ; C5.1@41.344,40.038 v1(42.584,40.038)
  Bottom Layer w0.762: C8.1 39.346,32.539 40.547,32.539 C7.1
  Bottom Layer w0.813: R3.2 6.667,15.266 7.76,14.173 8.661,14.173 v1(8.687,14.199) ; R5.2 6.667,17.806 7.734,16.739 8.509,16.739 v1(8.661,16.891) ; R7.2@6.667,20.346 7.76,19.253 v1(8.687,19.253) ; R9.2@6.667,22.886 7.76,21.793 v1(8.687,21.793) ; R11.2@6.667,25.426 7.76,24.333 v1(8.687,24.333) ; R13.2@6.667,27.966 7.76,26.873 v1(8.687,26.873) ; R15.2@6.667,30.506 7.76,29.413 v1(8.687,29.413) ; R17.2@6.667,33.046 7.76,31.953 v1(8.687,31.953) ; R19.2@6.667,35.586 7.76,34.493 v1(8.687,34.493) ; R21.2@6.667,38.126 7.76,37.033 v1(8.687,37.033) ; R23.2@6.667,40.666 7.76,39.573 v1(8.687,39.573) ; R25.2@6.667,43.206 7.76,42.113 v1(8.687,42.113) ; R27.2@6.667,45.746 7.76,44.653 v1(8.687,44.653) ; R29.2@6.667,48.286 7.76,47.193 v1(8.687,47.193) ; C9.1 C10.1 ; C5.1 C4.1 ; v1(52.4,16.688) 53.327,16.688 R31.2@54.42,17.781 ; v1(52.4,19.228) 53.327,19.228 R33.2@54.42,20.321 ; v1(52.4,21.768) 53.327,21.768 R35.2@54.42,22.861 ; v1(52.4,24.384) 52.476,24.308 53.327,24.308 R37.2@54.42,25.401 ; v1(52.4,26.899) 52.451,26.848 53.327,26.848 R39.2@54.42,27.941 ; v1(52.4,29.388) 53.327,29.388 R41.2@54.42,30.481 ; v1(52.4,31.928) 53.327,31.928 R43.2@54.42,33.021 ; v1(52.4,34.468) 53.327,34.468 R45.2@54.42,35.561 ; v1(52.4,37.008) 53.327,37.008 R47.2@54.42,38.101 ; v1(52.4,39.548) 53.327,39.548 R49.2@54.42,40.641 ; v1(52.4,42.113) 52.426,42.088 53.327,42.088 R51.2@54.42,43.181 ; v1(52.4,44.628) 53.327,44.628 R53.2@54.42,45.721 ; v1(52.4,47.168) 53.327,47.168 R55.2@54.42,48.261 ; v1(52.4,49.708) 53.327,49.708 R57.2@54.42,50.801 ; v1(52.4,52.299) 52.451,52.248 53.327,52.248 R59.2@54.42,53.341 ; v1(52.4,54.788) 53.327,54.788 R61.2@54.42,55.881
+9V: C1.2 C2.2 P1.2 U1.0 | length 10.2
  Top Layer w0.991: 6.905,55.147 6.945,55.107 C1.2@8.872,55.107 ; C1.2@8.912,55.067 C1.2@8.872,55.107 ; C1.2@8.999,55.107 C1.2@8.872,55.107 ; C1.2 C2.2 11.096,53.674 11.603,53.167 U1.0
BOOT0: P3.2 U2.44
GND: C1.1 C2.1 C3.1 C4.2 C5.2 C6.2 C7.2 C8.2 C9.2 C10.2 C11.2 C12.1 C13.1 C14.1 C15.1 D1.K P1.1 P2.4 P3.3 R4.1 R6.1 R8.1 R10.1 R12.1 R14.1 R16.1 R18.1 R20.1 R22.1 R24.1 R26.1 R28.1 R30.1 R32.1 R34.1 R36.1 R38.1 R40.1 R42.1 R44.1 R46.1 R48.1 R50.1 R52.1 R54.1 R56.1 R58.1 R60.1 R62.1 S1.1 U1.1 U2.8 U2.23 U2.35 U2.47 Y2.2 Y2.4 | length 186
  Top Layer w0.3: C14.1 v1(26.506,34.196) 26.506,35.47 Y2.4 26.571,35.635 27.971,37.035 27.971,37.435 Y2.2 ; C15.1@27.611,39.149 28.196,39.149 28.371,38.973 Y2.2 ; v1(29.806,38.309) 29.333,37.835 Y2.2 ; U2.8 34.833,36.533 34.908,36.609 v1(34.964,36.609) ; v1(34.329,39.276) 34.34,39.286 U2.47 ; v1(38.698,39.504) 38.727,39.533 U2.35 ; U2.23 38.84,35.252 v1(38.851,35.262)
  Top Layer w0.991: R4.1 v1@11.405,15.316 ; R6.1 v1(11.405,17.856) ; R8.1 v1@11.405,20.396 ; R10.1 v1@11.405,22.936 ; R12.1 v1@11.405,25.476 ; R14.1 v1@11.405,28.016 ; R16.1 v1@11.405,30.556 ; R18.1 v1@11.405,33.096 ; R20.1 v1@11.405,35.636 ; R22.1 v1@11.405,38.176 ; R24.1 v1@11.405,40.716 ; R26.1 v1@11.405,43.256 ; R28.1 v1@11.405,45.796 ; R30.1 v1@11.405,48.336 ; C3.1 17.798,57.767 v1(17.802,57.763) ; D1.K 26.438,54.832 v1(26.438,53.141) ; v1@49.682,17.831 R32.1 ; v1@49.682,20.371 R34.1 ; v1@49.682,22.911 R36.1 ; v1@49.682,25.451 R38.1 ; v1@49.682,27.991 R40.1 ; v1@49.682,30.531 R42.1 ; v1@49.682,33.071 R44.1 ; v1@49.682,35.611 R46.1 ; v1@49.682,38.151 R48.1 ; v1@49.682,40.691 R50.1 ; v1@49.682,43.231 R52.1 ; v1@49.682,45.771 R54.1 ; v1@49.682,48.311 49.695,48.298 54.416,48.298 54.42,48.303 R56.1 ; v1@49.682,50.851 R58.1 ; v1@49.682,53.391 R60.1 ; v1@49.682,55.931 R62.1
  Top Layer w1.092: 6.905,57.687 6.981,57.763 C1.1@8.908,57.763 ; C1.1@8.912,57.767 C1.1@8.908,57.763 ; C1.1@9.035,57.763 C1.1@8.908,57.763 ; C1.1 C2.1 C3.1
  Bottom Layer w0.3: v1(20.664,41.206) 20.69,41.181 21.909,41.181 ; C13.1 21.909,41.181 ; C12.1 21.909,41.181 ; C6.2 33.84,39.781 34.329,39.292 v1(34.329,39.276)
  Bottom Layer w0.813: C9.2 C10.2@33.24,36.07 ; C11.2 C10.2@33.24,36.07 ; v1(34.964,36.609) 34.433,36.077 33.246,36.077 C10.2@33.24,36.07 ; v1(38.698,39.504) 39.437,39.504 39.929,39.996 C4.2 ; v1(38.851,35.262) 39.296,34.817 39.296,33.94 39.303,33.933 C8.2 39.346,33.939 40.547,33.939 C7.2
  other v1: 11.405,15.291 49.682,17.805 49.682,20.345 11.405,20.371 49.682,22.885 11.405,22.911 49.682,25.425 11.405,25.451 49.682,27.965 11.405,27.991 49.682,30.505 11.405,30.531 49.682,33.045 11.405,33.071 49.682,35.585 11.405,35.611 49.682,38.125 11.405,38.151 49.682,40.665 11.405,40.691 49.682,43.205 11.405,43.231 49.682,45.745 11.405,45.771 49.682,48.285 11.405,48.311 49.682,50.825 49.682,53.365 49.682,55.905
IN/OUT: C14.2 R1.2 Y2.1 | length 2.1
  Top Layer w0.406: R1.2@28.371,33.459 28.371,34.526 Y2.1
NetD1_A: D1.A R2.2 | length 2.2
  Top Layer w1.067: D1.A R2.2
NetR1_1: R1.1 U2.6 | length 6.6
  Top Layer w0.3: R1.1@29.871,33.459 29.871,37.231 30.174,37.533 U2.6
NRST: C11.1 S1.2 U2.7 | length 17.4
  Top Layer w0.3: v1(30.646,36.736) 30.703,36.736 31,37.033 U2.7
  Bottom Layer w0.3: S1.2 21.756,35.847 25.058,39.149 29.909,39.149 30.646,38.411 v1(30.646,36.736) 30.703,36.736 31.166,37.199 31.795,37.199 C11.1
OUT/IN: C15.2 U2.5 Y2.3 | length 8.7
  Top Layer w0.3: 26.571,38.844 C15.2 26.571,39.646 26.836,39.911 28.991,39.911 30.868,38.033 U2.5
  Top Layer w0.406: Y2.3 26.571,38.844
PA0: P4.13 R27.1 R28.2 U2.10 | length 58.1
  Top Layer w0.254: R28.2 4.967,44.741 5.588,44.12 11.938,44.12 16.205,39.853 16.205,27.813 21.158,22.86 29.867,22.86 32.614,25.607 32.614,31.394 30.531,33.477 30.531,34.456 31.599,35.524 32.531,35.524 U2.10
PA1: P4.12 R25.1 R26.2 U2.11 | length 56
  Top Layer w0.254: R26.2 4.967,42.303 5.69,41.58 12.014,41.58 15.799,37.795 15.799,27.635 20.98,22.454 30.035,22.454 33.02,25.438 33.02,31.598 30.937,33.68 30.937,34.288 31.674,35.024 32.531,35.024 U2.11
PA2: P4.11 R23.1 R24.2 U2.12 | length 54.1
  Top Layer w0.254: R24.2 4.967,39.636 5.588,39.014 12.192,39.014 15.392,35.814 15.392,27.457 20.803,22.047 30.204,22.047 33.426,25.27 33.426,31.775 31.414,33.788 31.414,34.157 31.79,34.533 U2.12
PA3: P4.10 R21.1 R22.2 U2.13 | length 50.1
  Top Layer w0.254: R22.2 4.967,37.299 5.766,36.5 13.106,36.5 14.986,34.62 14.986,27.254 20.599,21.641 30.372,21.641 33.84,25.109 U2.13
PA4: P4.9 R19.1 R20.2 U2.14 | length 48.9
  Top Layer w0.254: R20.2 4.967,34.607 5.613,33.96 12.573,33.96 14.376,32.156 14.376,26.797 19.939,21.234 30.607,21.234 34.34,24.967 U2.14
PA5: P4.8 R17.1 R18.2 U2.15 | length 48.3
  Top Layer w0.254: R18.2 4.967,32.143 5.69,31.42 13.259,31.42 13.792,30.886 13.792,26.289 19.253,20.828 30.912,20.828 34.84,24.756 U2.15
PA6: P4.7 R15.1 R16.2 U2.16 | length 46.6
  Top Layer w0.254: R16.2 4.967,29.577 5.69,28.854 12.446,28.854 13.132,28.169 13.132,26.213 18.923,20.422 31.08,20.422 35.34,24.681 U2.16
PA7: P4.6 R13.1 R14.2 U2.17 | length 45.3
  Top Layer w0.254: R14.2 4.967,26.961 5.613,26.314 12.065,26.314 18.364,20.015 31.248,20.015 35.84,24.607 U2.17
PA8: P5.5 R39.1 R40.2 U2.29 | length 22.9
  Top Layer w0.254: U2.29 42.517,36.533 46.038,33.012 46.038,29.476 49.149,26.365 55.296,26.365 56.12,27.19 R40.2
PA9: P5.6 R41.1 R42.2 U2.30 | length 21.1
  Top Layer w0.254: U2.30 42.591,37.033 46.444,33.18 46.444,31.457 49.082,28.82 55.185,28.82 56.114,29.749 56.114,30.524 R42.2
PA10: P5.7 R43.1 R44.2 U2.31 | length 19.2
  Top Layer w0.254: U2.31 42.666,37.533 48.83,31.369 55.22,31.369 56.12,32.27 R44.2
PA11: P5.8 R45.1 R46.2 U2.32 | length 18.3
  Top Layer w0.254: U2.32 42.741,38.033 46.84,33.934 55.22,33.934 56.114,34.829 56.114,35.604 R46.2
PA12: P5.9 R47.1 R48.2 U2.33 | length 17.5
  Top Layer w0.254: U2.33 42.823,38.533 44.882,36.474 55.245,36.474 56.12,37.35 R48.2
PA15: P5.10 R49.1 R50.2 U2.38 | length 20.9
  Top Layer w0.254: U2.38 38.849,41.342 38.849,42.199 39.162,42.513 43.644,42.513 47.142,39.014 55.296,39.014 56.12,39.839 R50.2
PB0: P4.5 R11.1 R12.2 U2.18 | length 45.1
  Top Layer w0.254: R12.2 4.967,24.548 5.749,23.766 11.671,23.766 15.828,19.609 31.417,19.609 36.34,24.532 U2.18
PB1: P4.4 R9.1 R10.2 U2.19 | length 44.9
  Top Layer w0.254: R10.2 4.967,22.005 5.746,21.226 13.636,21.226 15.659,19.202 31.585,19.202 36.841,24.458 U2.19
PB2: P4.3 R7.1 R8.2 U2.20 | length 44.8
  Top Layer w0.254: R8.2 4.967,19.443 5.715,18.694 31.652,18.694 37.34,24.383 U2.20
PB3: P5.11 R51.1 R52.2 U2.39 | length 20.7
  Top Layer w0.254: U2.39 38.349,41.342 38.349,42.274 38.994,42.919 43.822,42.919 45.161,41.58 55.321,41.58 56.12,42.379 R52.2
PB4: P5.12 R53.1 R54.2 U2.40 | length 21.2
  Top Layer w0.254: U2.40 37.849,41.342 37.849,42.349 38.825,43.325 46.6,43.325 47.344,44.069 55.22,44.069 56.12,44.97 R54.2
PB5: P5.13 R55.1 R56.2 U2.41 | length 22.8
  Top Layer w0.254: U2.41 37.349,41.343 37.349,42.423 38.657,43.732 46.373,43.732 49.276,46.634 55.245,46.634 56.088,47.478 56.088,48.279 R56.2
PB6: P5.14 R57.1 R58.2 U2.42 | length 24.4
  Top Layer w0.254: U2.42 36.849,41.342 36.849,42.498 38.496,44.145 44.317,44.145 49.335,49.163 55.284,49.163 56.12,49.999 R58.2
PB7: P5.15 R59.1 R60.2 U2.43 | length 26.6
  Top Layer w0.254: U2.43 36.349,41.342 36.349,42.573 38.327,44.552 43.155,44.552 47.371,48.768 47.371,49.911 49.225,51.765 55.27,51.765 56.114,52.609 56.114,53.384 R60.2
PB8: P5.16 R61.1 R62.2 U2.45
PB9: P4.14 R29.1 R30.2 U2.46 | length 34.5
  Top Layer w0.254: R30.2 4.967,47.459 5.791,46.634 13.259,46.634 15.672,44.221 33.985,44.221 34.84,43.367 U2.46
PB10: P4.2 R5.1 R6.2 U2.21 | length 46.4
  Top Layer w0.254: R6.2 4.967,16.725 5.334,16.358 29.89,16.358 37.84,24.308 U2.21
PB11: P4.1 R3.1 R4.2 U2.22 | length 48
  Top Layer w0.254: R4.2 4.967,14.365 5.667,13.665 27.772,13.665 38.329,24.222 U2.22@38.329,33.233
PB12: P5.1 R31.1 R32.2 U2.25 | length 32.2
  Top Layer w0.254: U2.25 41.258,34.533 41.279,34.512 41.279,34.18 41.428,34.031 42.72,34.031 43.453,33.298 43.453,20.554 48.183,15.824 54.114,15.824 54.991,15.824 56.12,16.954 R32.2
PB13: P5.2 R33.1 R34.2 U2.26 | length 29.6
  Top Layer w0.254: U2.26 42.293,35.033 44.819,32.507 44.819,22.237 48.387,18.669 55.397,18.669 56.12,19.392 R34.2
PB14: P5.3 R35.1 R36.2 U2.27 | length 23.2
  Top Layer w0.254: U2.27 42.367,35.533 45.225,32.675 45.225,25.057 49.124,21.158 53.467,21.158
PB15: P5.4 R37.1 R38.2 U2.28 | length 24.4
  Top Layer w0.254: U2.28 42.442,36.033 45.632,32.844 45.632,28.406 50.263,23.774 55.296,23.774 56.12,24.599 R38.2
SWCLK: P2.3 U2.37
SWDIO: P2.2 U2.34
pads on no net: U2.1 U2.2

## Polygon pours and split planes (outlines as drawn)
GND on GND_layer (split plane): 60.45,13.312 0.51,13.312 0.51,59.434 60.45,59.434
+3.3V on 3.3V_layer (split plane): 60.45,13.312 0.51,13.312 0.51,59.434 60.45,59.434

## Keep-outs
Keep-Out Layer:
  the board outline again, w0.813

## Dimensions
60.96,59.944 to 60.96,12.802 on Mechanical 15
0,12.802 to 60.96,12.802 on Mechanical 15